# Altium PCB MidBoard.PcbDoc (part 1 of 3)
Units mm, origin at the board's own origin, x right, y up, seen from the top; angles counter-clockwise.
Board outline 150.95 x 96 mm, 2 copper layers (Top Layer, Bottom Layer); 315 components, 238 nets, 1021 pads, 291 vias.
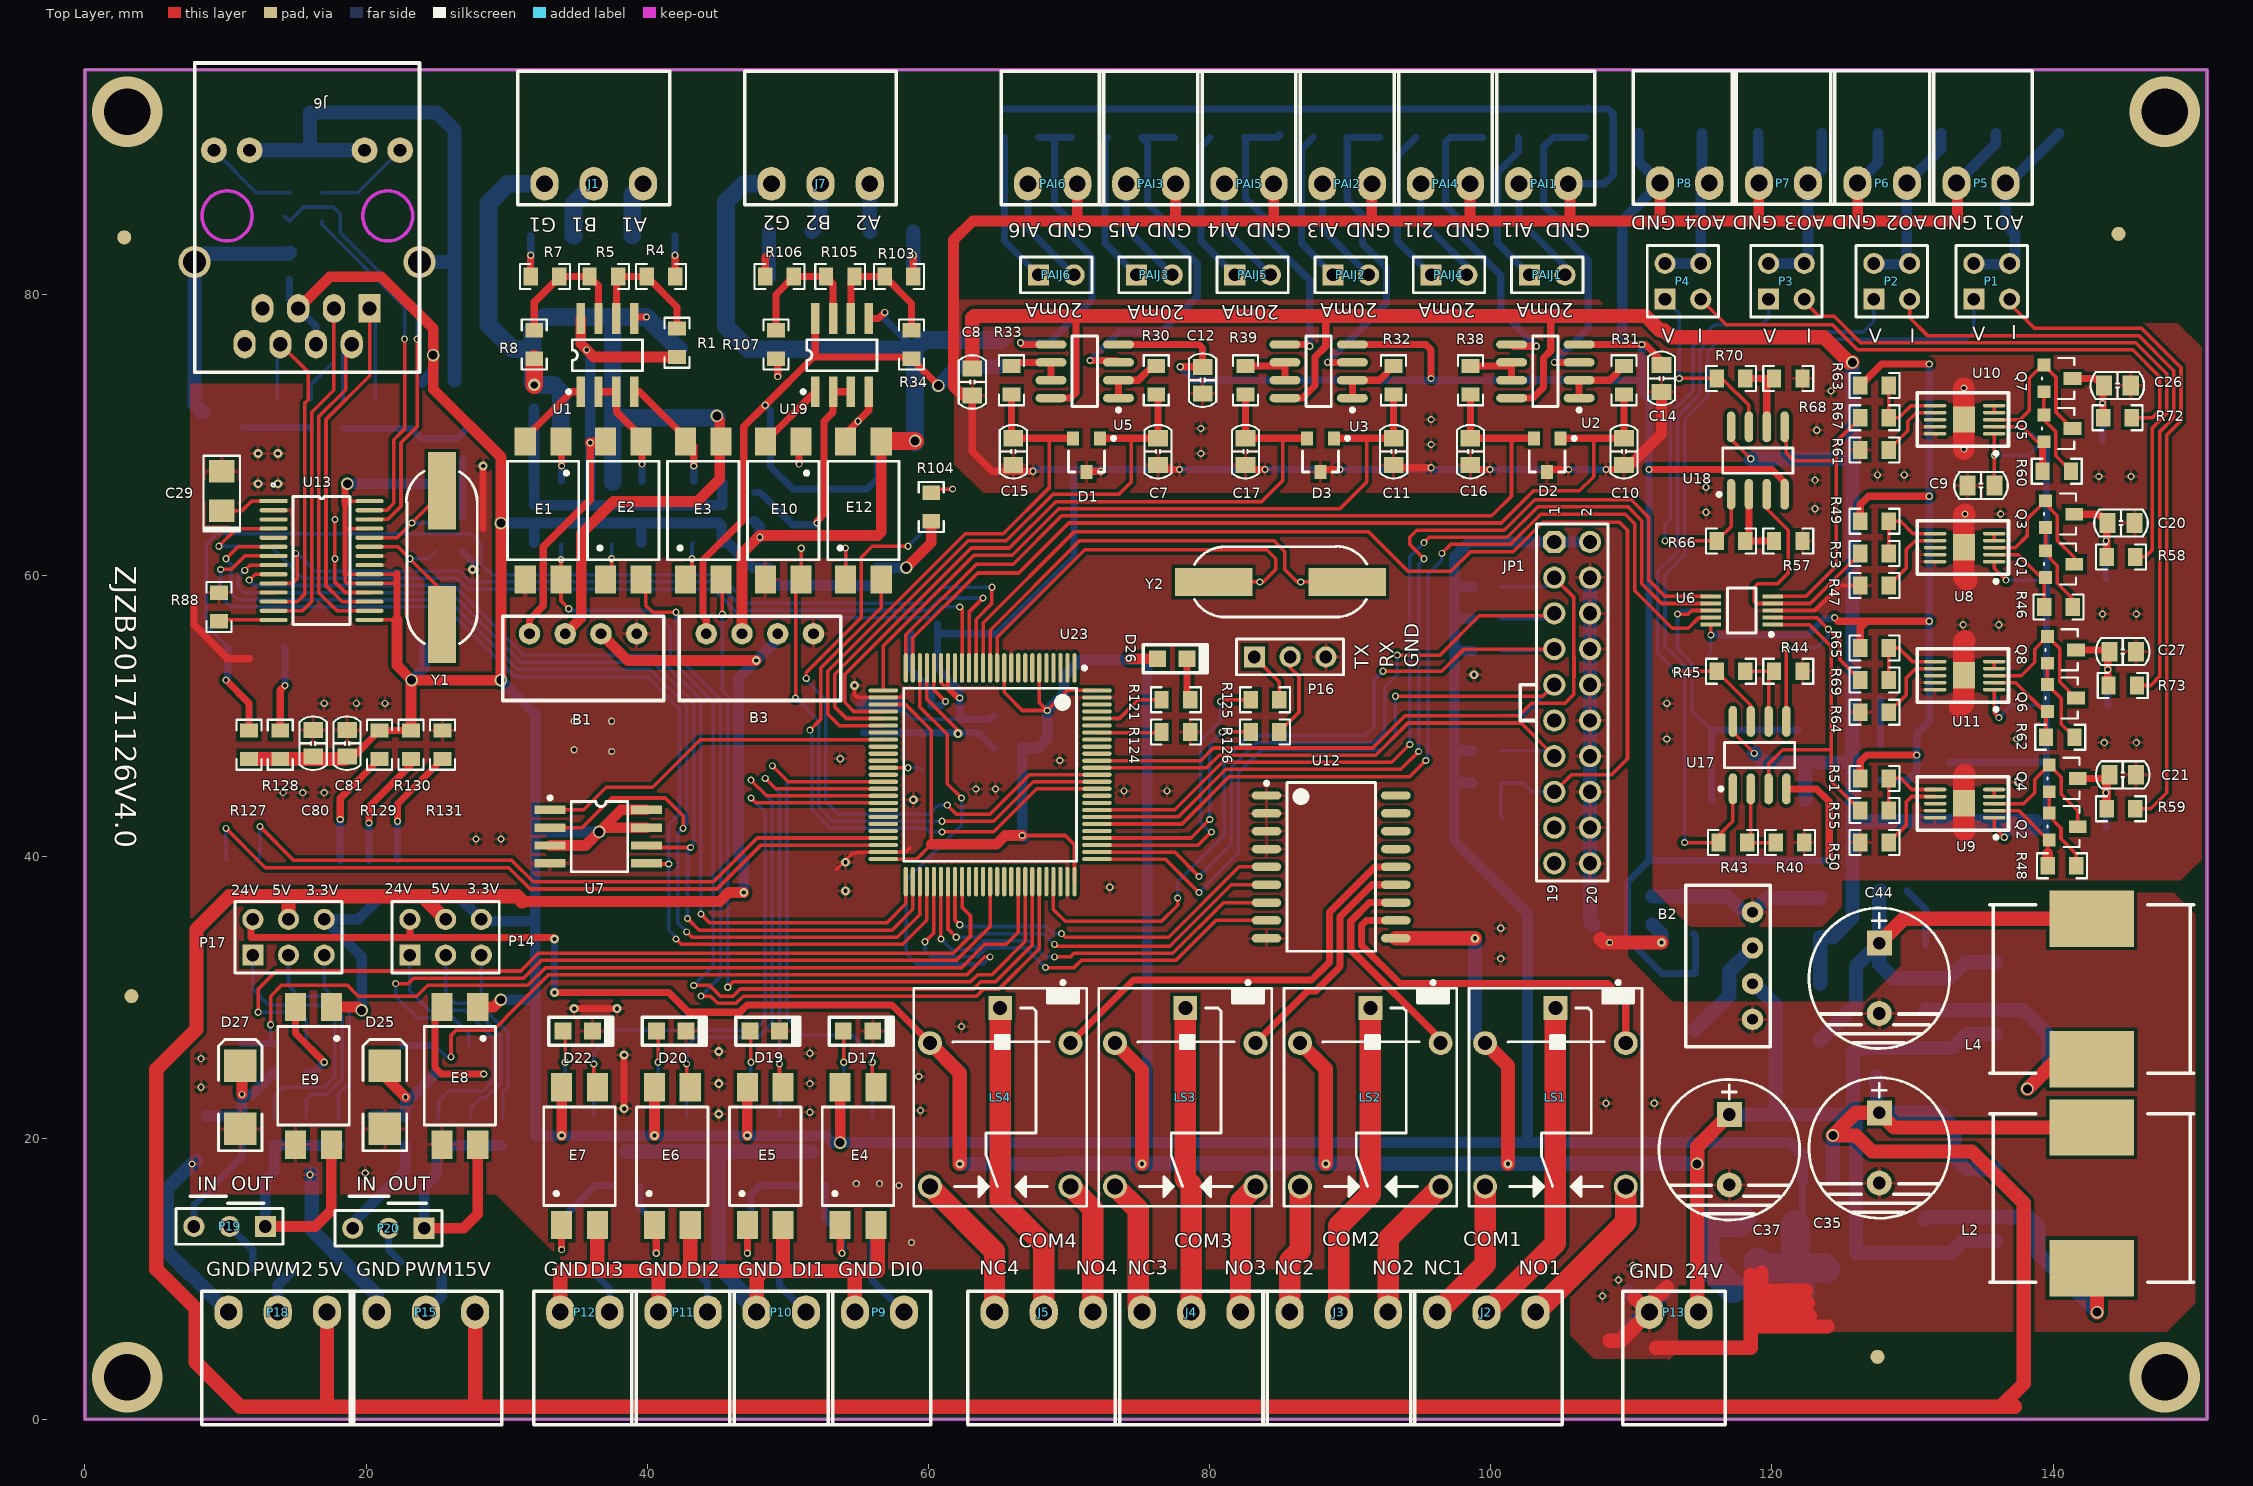
[diagram p0: Top Layer view]
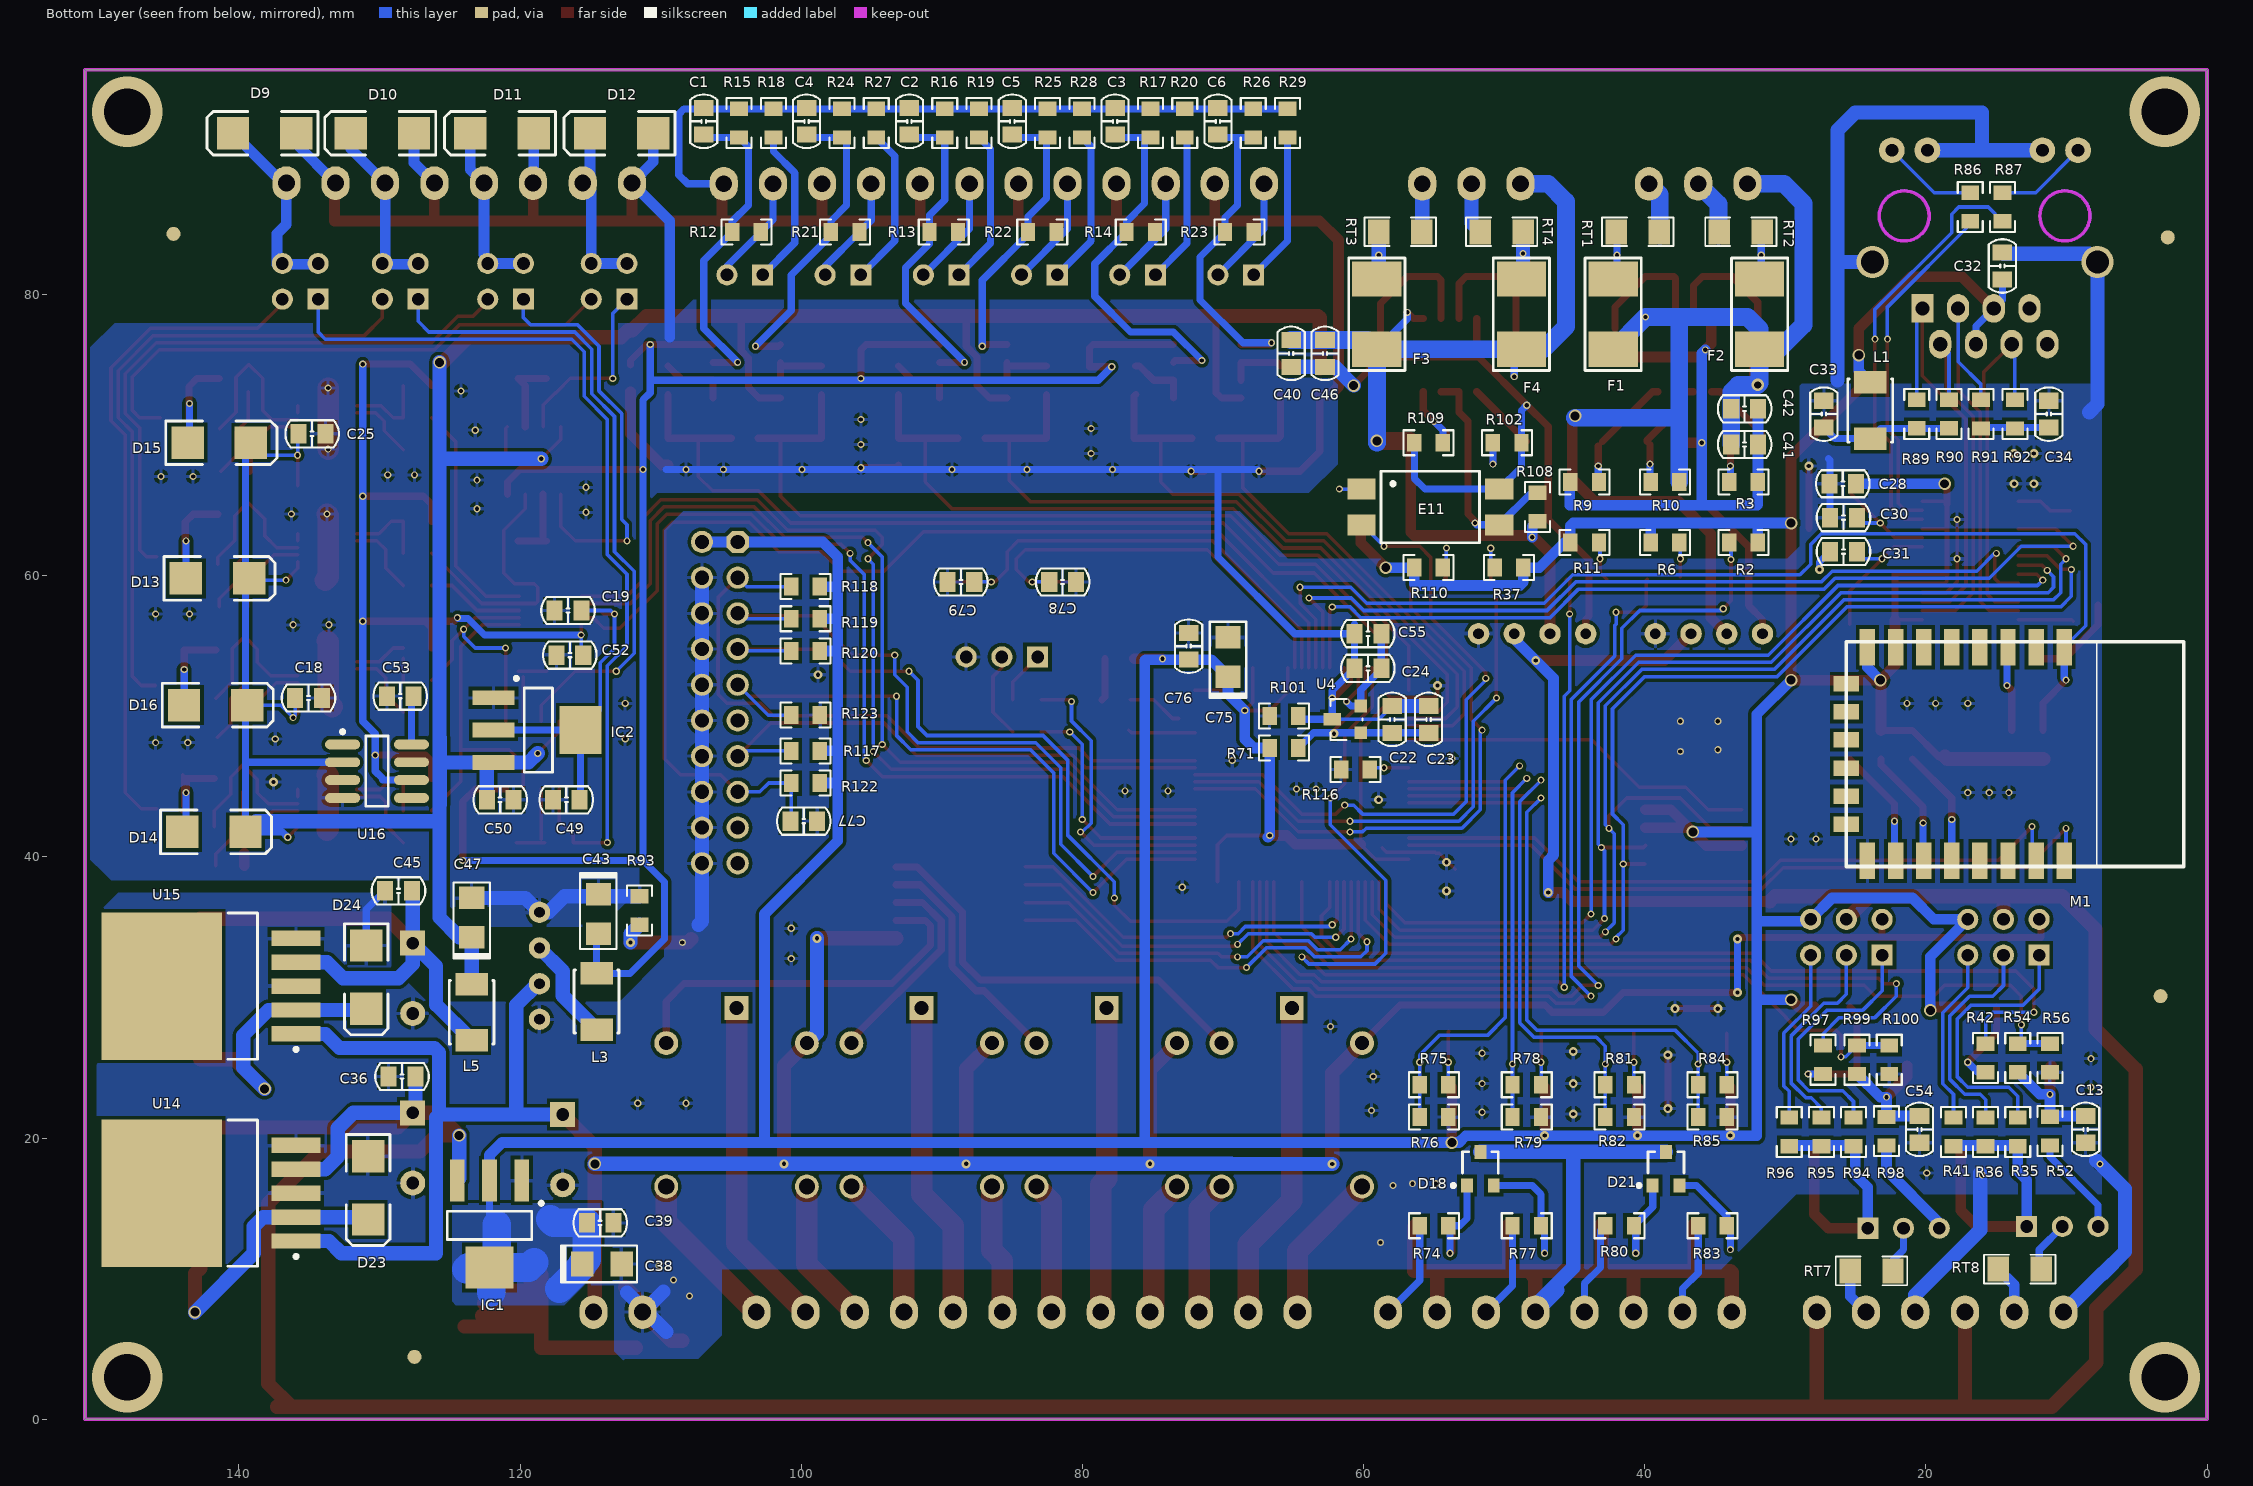
[diagram p1: Bottom Layer view, seen from below]

## Layer stack, top to bottom
Top Solder: solder mask 0.0102, Solder Resist, Dk 3.5
Top Layer: signal copper 0.0356
Dielectric1: dielectric 0.32, FR-4, Dk 4.8
Bottom Layer: signal copper 0.0356
Bottom Solder: solder mask 0.0102, Solder Resist, Dk 3.5

## Board outline
0,0 0,96 150.95,96 150.95,0

## Design rules (kind name [scope] priority, off if disabled: settings)
Clearance [All] p1: gap=0.178 ignorepadtopadclearanceinfootprint=FALSE except(0: Arc-Hole Track-Hole SMDPad-Hole THPad-Hole Via-Hole Fill-Hole Poly-Hole Region-Hole Text-Hole)
HoleSize [All] p1: absolutevalues=TRUE maxlimit=5.08 minlimit=0.025 maxpercent=80.000 minpercent=20.000
MinimumSolderMaskSliver [All] p1: minsoldermaskwidth=0.025
PlaneConnect [All] p1: planeconnectstyle=Relief reliefexpansion=0.508 reliefentries=4 reliefconductorwidth=0.254 reliefairgap=0.381
PolygonConnect [All] p1: connectstyle=Relief reliefconductorwidth=0.254 reliefentries=4 polygonreliefangle="90 Angle" airgapwidth=0.254
RoutingVias [All] p1: holewidth=0.711 width=1.27 viastyle="Through Hole" minholewidth=0.711 minwidth=1.27 maxholewidth=0.711 maxwidth=1.27
SilkToSilkClearance [All] p1: silktosilkclearance=0.051
SilkToSolderMaskClearance SilkscreenOverComponentPads [IsPad] p1: minsilkscreentomaskgap=0 clearancetoexposedcopper=TRUE
SolderMaskExpansion [All] p1: expansion=0.102
Width [All] p1: maxlimit=2.032 minlimit=0.254 preferedwidth=0.254 minimp=50.000000 maximp=50.000000 favimp=50.000000
25 further rules are at their usual default settings.

## Classes and differential pairs
component class MidPwm: C13 C54 D25 D27 E8 E9 P14 P15 P17 P18 P19 P20 R35 R36 R41 R42 R52 R54 R56 R94 R95 R96 R97 R98 R99 R100 RT7 RT8
component class MidWifi: C80 C81 M1 R127 R128 R129 R130 R131
component class MidPower: B1 B2 B3 C35 C36 C37 C38 C39 C40 C41 C42 C43 C44 C45 C46 C47 C49 C50 C52 C53 D23 D24 IC1 IC2 L2 L3 L4 L5 P13 R93 U14 U15 U16
component class MidEthernet: C28 C29 C30 C31 C32 C33 C34 J6 L1 R86 R87 R88 R89 R90 R91 R92 U13 Y1
component class MidDin: D17 D18 D19 D20 D21 D22 E4 E5 E6 E7 P9 P10 P11 P12 R74 R75 R76 R77 R78 R79 R80 R81 R82 R83 R84 R85
component class MidDac: C18 C19 C20 C21 C25 C26 C27 D9 D10 D11 D12 D13 D14 D15 D16 P1 P2 P3 P4 P5 P6 P7 P8 Q1 Q2 Q3 Q4 Q5 Q6 Q7 Q8 R40 R43 R44 R45 R46 R47 R48 R49 R50 R51 R53 R55 R57 R58 R59 R60 R61 R62 R63 R64 R65 R66 R67 R68 R69 R70 R72 R73 U6 U8 U9 U10 U11 U17 U18
component class Mid485: E1 E2 E3 E10 E11 E12 F1 F2 F3 F4 J1 J7 R1 R2 R3 R4 R5 R6 R7 R8 R9 R10 R11 R34 R37 R102 R103 R104 R105 R106 R107 R108 R109 R110 RT1 RT2 RT3 RT4 U1 U19
component class STM_MCU: C22 C23 C24 C55 C75 C76 C77 C78 C79 D26 JP1 P16 R71 R101 R116 R117 R118 R119 R120 R121 R122 R123 R124 R125 R126 U4 U7 U23 Y2
component class MidAdc: C1 C2 C3 C4 C5 C6 C7 C8 C9 C10 C11 C12 C14 C15 C16 C17 D1 D2 D3 PAI1 PAI2 PAI3 PAI4 PAI5 PAI6 PAIJ1 PAIJ2 PAIJ3 PAIJ4 PAIJ5 PAIJ6 R12 R13 R14 R15 R16 R17 R18 R19 R20 R21 R22 R23 R24 R25 R26 R27 R28 R29 R30 R31 R32 R33 R38 R39 U2 U3 U5
component class MidDout: J2 J3 J4 J5 LS1 LS2 LS3 LS4 U12

## Components (designator, comment, footprint, x,y, rotation, side; value= is the part's Value field where it differs from the comment)
B1 "B0505S" B0505S 39.243,55.88 r270 top
B2 "B2412S" B0505S 118.618,28.448 r180 top
B3 "B0505S" B0505S 51.816,55.88 r270 top
C1 "Cap" C0805 106.934,92.329 r270 bottom
C2 "Cap" C0805 92.304,92.329 r270 bottom
C3 "Cap" C0805 77.674,92.329 r270 bottom
C4 "Cap" C0805 99.619,92.329 r270 bottom
C5 "Cap" C0805 84.989,92.329 r270 bottom
C6 "Cap" C0805 70.358,92.329 r270 bottom
C7 "Cap" C0805 76.327,68.834 r90 top
C8 "Cap" C0805 63.119,73.787 r90 top
C9 "Cap" C0805 134.874,66.421 r0 top
C10 "Cap" C0805 109.474,68.834 r90 top
C11 "Cap" C0805 93.091,68.834 r90 top
C12 "Cap" C0805 79.502,73.914 r90 top
C13 "Cap" C0805 8.636,20.622 r90 bottom
C14 "Cap" C0805 112.141,74.041 r90 top
C15 "Cap" C0805 66.04,68.834 r90 top
C16 "Cap" C0805 98.552,68.834 r90 top
C17 "Cap" C0805 82.55,68.834 r90 top
C18 "Cap" C0805 135.049,51.308 r0 bottom
C19 "Cap" C0805 116.586,57.531 r180 bottom
C20 "Cap" C0805 144.828,63.754 r180 top
C21 "Cap" C0805 144.955,45.847 r180 top
C22 "Cap" C0805 57.96,49.784 r90 bottom
C23 "Cap" C0805 55.372,49.784 r90 bottom
C24 "0.1uF" C0805 59.69,53.419 r0 bottom
C25 "Cap" C0805 134.795,70.104 r0 bottom
C26 "Cap" C0805 144.574,73.533 r180 top
C27 "Cap" C0805 144.955,54.61 r180 top
C28 "Cap" C0805 25.908,66.548 r0 bottom
C29 "" C3216 9.731,66.04 r90 top
C30 "Cap" C0805 25.86,64.135 r0 bottom
C31 "Cap" C0805 25.86,61.722 r0 bottom
C32 "Cap" C0805 14.557,82.042 r90 bottom
C33 "Cap" C0805 27.257,71.501 r90 bottom
C34 "Cap" C0805 11.255,71.501 r90 bottom
C35 "Cap Pol1" Cap5*10*12 127.635,21.844 r270 top
C36 "Cap" C0805 128.397,24.384 r0 bottom
C37 "Cap Pol1" Cap5*10*12 116.967,21.717 r270 top
C38 "" C3216 114.173,11.049 r180 bottom
C39 "Cap" C0805 114.3,13.97 r0 bottom
C40 "Cap" C0805 65.151,75.819 r90 bottom
C41 "Cap" C0805 32.893,69.342 r0 bottom
C42 "Cap" C0805 32.893,71.882 r0 bottom
C43 "" C3216 114.427,35.941 r270 bottom
C44 "Cap Pol1" Cap5*10*12 127.635,33.909 r270 top
C45 "Cap" C0805 128.651,37.592 r0 bottom
C46 "Cap" C0805 62.738,75.819 r90 bottom
C47 "" C3216 123.444,35.687 r90 bottom
C49 "Cap" C0805 116.713,44.069 r180 bottom
C50 "Cap" C0805 121.412,44.069 r0 bottom
C52 "Cap" C0805 116.459,54.356 r180 bottom
C53 "Cap" C0805 128.524,51.435 r180 bottom
C54 "Cap" C0805 20.451,20.622 r90 bottom
C55 "3.3uF" C0805 59.69,55.88 r0 bottom
C75 "" C3216 69.644,54.229 r90 bottom
C76 "Cap" C0805 72.438,54.991 r90 bottom
C77 "104" C0805 99.822,42.545 r180 bottom
C78 "Cap" C0805 81.407,59.563 r180 bottom
C79 "Cap" C0805 88.646,59.563 r0 bottom
C80 "Cap" C0805 16.233,48.085 r270 top
C81 "Cap" C0805 18.646,48.085 r270 top
D1 "BAT54A" SOT23 71.247,68.58 r180 top
D2 "BAT54A" SOT23 104.013,68.58 r180 top
D3 "BAT54A" SOT23 87.884,68.58 r180 top
D9 "P6KE13A" SMB 138.176,91.488 r0 bottom
D10 "P6KE13A" SMB 129.794,91.488 r0 bottom
D11 "P6KE13A" SMB 121.285,91.488 r0 bottom
D12 "P6KE13A" SMB 112.776,91.488 r0 bottom
D13 "SS16" SMB 141.526,59.817 r180 bottom
D14 "SS16" SMB 141.78,41.783 r180 bottom
D15 "SS16" SMB 141.399,69.469 r180 bottom
D16 "SS16" SMB 141.653,50.8 r180 bottom
D17 "SML-P12YTT86" D0805 54.991,27.607 r180 top
D18 "BAT54A" SOT23 51.689,17.828 r180 bottom
D19 "SML-P12YTT86" D0805 48.345,27.607 r180 top
D20 "SML-P12YTT86" D0805 41.698,27.607 r180 top
D21 "BAT54A" SOT23 38.481,17.828 r180 bottom
D22 "SML-P12YTT86" D0805 35.052,27.607 r180 top
D23 "SK36B" SMB 130.81,16.462 r270 bottom
D24 "SK36B" SMB 130.937,31.448 r270 bottom
D25 "P6KE6.8A" SMB 21.336,22.908 r90 top
D26 "SML-P12YTT86" D0805 77.343,54.102 r180 top
D27 "P6KE6.8A" SMB 11.049,22.908 r90 top
E1 "PS2501L-1" NEC2501 32.591,64.643 r180 top
E2 "PS2501L-1" NEC2501 38.286,64.643 r0 top
E3 "PS2501L-1" NEC2501 43.981,64.643 r0 top
E4 "PS2501L-1" NEC2501 54.991,18.717 r0 top
E5 "PS2501L-1" NEC2501 48.387,18.717 r0 top
E6 "PS2501L-1" NEC2501 41.783,18.717 r0 top
E7 "PS2501L-1" NEC2501 35.179,18.717 r0 top
E8 "PS2501L-1" NEC2501 26.67,24.432 r180 top
E9 "PS2501L-1" NEC2501 16.256,24.432 r180 top
E10 "PS2501L-1" NEC2501 49.677,64.643 r180 top
E11 "PS2501L-1" NEC2501 55.245,64.897 r270 bottom
E12 "PS2501L-1" NEC2501 55.372,64.643 r0 top
F1 "P6KE6.8CA" P6KE6,8CA 42.243,78.613 r90 bottom
F2 "P6KE6.8CA" P6KE6,8CA 31.829,78.613 r270 bottom
F3 "P6KE6.8CA" P6KE6,8CA 59.055,78.613 r90 bottom
F4 "P6KE6.8CA" P6KE6,8CA 48.768,78.613 r270 bottom
IC1 "LM1117-3.3" LM1117 122.174,10.795 r0 bottom
IC2 "LM1117-5.0" LM1117 115.697,49.022 r270 bottom
J1 "*" 3.5-P3 36.195,87.884 r180 top
J2 "*" 3.5-P3 99.695,7.62 r0 top
J3 "*" 3.5-P3 89.196,7.62 r0 top
J4 "*" 3.5-P3 78.698,7.62 r0 top
J5 "*" 3.5-P3 68.199,7.62 r0 top
J6 "HR911105A" HR911105A 16.208,89.916 r90 top
J7 "*" 3.5-P3 52.324,87.884 r180 top
JP1 "HEADER 10X2" STM32-JLINK 105.664,51.054 r90 top
L1 "10uH" INDM4532N 23.955,71.755 r270 bottom
L2 "68uH" IND_HM00_12*12 142.748,15.748 r90 top
L3 "10uH" INDM4532N 114.554,29.718 r270 bottom
L4 "68uH" IND_HM00_12*12 142.748,30.607 r90 top
L5 "10uH" INDM4532N 123.444,28.956 r90 bottom
LS1 "RELAY SPDT" RELAY_OMRON_G5LE-14 109.601,16.558 r90 top
LS2 "RELAY SPDT" RELAY_OMRON_G5LE-14 96.435,16.558 r90 top
LS3 "RELAY SPDT" RELAY_OMRON_G5LE-14 83.27,16.558 r90 top
LS4 "RELAY SPDT" RELAY_OMRON_G5LE-14 70.104,16.558 r90 top
M1 "ESP-12E&F Module" "ESP-12E&F Module" 17.907,47.323 r270 bottom
P1 "Header 2X2" HDR2X2 134.366,79.677 r0 top
P2 "Header 2X2" HDR2X2 127.254,79.677 r0 top
P3 "Header 2X2" HDR2X2 119.761,79.677 r0 top
P4 "Header 2X2" HDR2X2 112.395,79.677 r0 top
P5 "Header 2" 3.5-P2 134.874,87.932 r180 top
P6 "Header 2" 3.5-P2 127.847,87.932 r180 top
P7 "Header 2" 3.5-P2 120.819,87.932 r180 top
P8 "Header 2" 3.5-P2 113.792,87.932 r180 top
P9 "Header 2" 3.5-P2 56.515,7.62 r0 top
P10 "Header 2" 3.5-P2 49.53,7.62 r0 top
P11 "Header 2" 3.5-P2 42.545,7.62 r0 top
P12 "Header 2" 3.5-P2 35.56,7.62 r0 top
P13 "Header 2" 3.5-P2 113.03,7.62 r0 top
P14 "Header 3X2" HDR2X3 23.114,33.02 r0 top
P15 "*" 3.5-P3 24.257,7.62 r0 top
P16 "Header 3" HDR1X3 83.185,54.229 r0 top
P17 "Header 3X2" HDR2X3 11.938,33.02 r0 top
P18 "*" 3.5-P3 13.716,7.62 r0 top
P19 "Header 3" HDR1X3 12.827,13.716 r180 top
P20 "Header 3" HDR1X3 24.13,13.589 r180 top
PAI1 "Header 2" 3.5-P2 103.759,87.884 r180 top
PAI2 "Header 2" 3.5-P2 89.789,87.884 r180 top
PAI3 "Header 2" 3.5-P2 75.819,87.884 r180 top
PAI4 "Header 2" 3.5-P2 96.774,87.884 r180 top
PAI5 "Header 2" 3.5-P2 82.804,87.884 r180 top
PAI6 "Header 2" 3.5-P2 68.834,87.884 r180 top
PAIJ1 "Header 2" HDR1X2 102.743,81.407 r0 top
PAIJ2 "Header 2" HDR1X2 88.773,81.407 r0 top
PAIJ3 "Header 2" HDR1X2 74.803,81.407 r0 top
PAIJ4 "Header 2" HDR1X2 95.758,81.407 r0 top
PAIJ5 "Header 2" HDR1X2 81.788,81.407 r0 top
PAIJ6 "Header 2" HDR1X2 67.818,81.407 r0 top
Q1 "SS8550" sot-23 140.485,60.833 r270 top
Q2 "SS8550" sot-23 140.739,42.164 r270 top
Q3 "SI2309" sot-23 140.485,64.389 r270 top
Q4 "SI2309" sot-23 140.739,45.593 r270 top
Q5 "SS8550" sot-23 140.358,70.485 r270 top
Q6 "SS8550" sot-23 140.612,51.308 r270 top
Q7 "SI2309" sot-23 140.358,74.041 r270 top
Q8 "SI2309" sot-23 140.612,54.737 r270 top
R1 "Res Semi" 0805 42.116,76.581 r180 top
R2 "Res Semi" 0805 32.972,62.357 r90 bottom
R3 "Res Semi" 0805 32.972,66.675 r270 bottom
R4 "Res Semi" 0805 40.973,81.28 r90 top
R5 "Res Semi" 0805 36.909,81.28 r270 top
R6 "Res Semi" 0805 38.56,62.357 r270 bottom
R7 "Res Semi" 0805 32.718,81.28 r270 top
R8 "Res Semi" 0805 31.956,76.454 r0 top
R9 "Res Semi" 0805 44.275,66.675 r90 bottom
R10 "Res Semi" 0805 38.56,66.675 r90 bottom
R11 "Res Semi" 0805 44.275,62.357 r270 bottom
R12 "Res2" 0805 103.886,84.455 r270 bottom
R13 "Res2" 0805 89.865,84.455 r270 bottom
R14 "Res2" 0805 75.844,84.455 r270 bottom
R15 "Res2" 0805 104.419,92.201 r0 bottom
R16 "Res2" 0805 89.789,92.201 r0 bottom
R17 "Res2" 0805 75.158,92.201 r0 bottom
R18 "Res Semi" 0805 101.981,92.201 r0 bottom
R19 "Res Semi" 0805 87.35,92.201 r0 bottom
R20 "Res Semi" 0805 72.72,92.201 r0 bottom
R21 "Res2" 0805 96.876,84.455 r270 bottom
R22 "Res2" 0805 82.855,84.455 r270 bottom
R23 "Res2" 0805 68.834,84.455 r270 bottom
R24 "Res2" 0805 97.104,92.201 r0 bottom
R25 "Res2" 0805 82.474,92.201 r0 bottom
R26 "Res2" 0805 67.843,92.201 r0 bottom
R27 "Res Semi" 0805 94.665,92.201 r0 bottom
R28 "Res Semi" 0805 80.035,92.201 r0 bottom
R29 "Res Semi" 0805 65.405,92.201 r0 bottom
R30 "Res Semi" 0805 76.2,73.914 r0 top
R31 "Res Semi" 0805 109.474,73.914 r0 top
R32 "Res Semi" 0805 93.091,73.914 r0 top
R33 "Res Semi" 0805 65.913,73.914 r0 top
R34 "Res Semi" 0805 58.801,76.454 r180 top
R35 "Res Semi" 0805 13.462,20.447 r180 bottom
R36 "Res Semi" 0805 15.748,20.447 r180 bottom
R37 "Res Semi" 0805 49.657,60.579 r90 bottom
R38 "Res Semi" 0805 98.552,73.914 r0 top
R39 "Res Semi" 0805 82.55,73.914 r0 top
R40 "Res2" 0805 121.285,41.021 r270 top
R41 "Res Semi" 0805 18.034,20.447 r180 bottom
R42 "Res Semi" 0805 15.748,25.702 r0 bottom
R43 "Res2" 0805 117.221,41.021 r270 top
R44 "Res2" 0805 121.158,53.213 r270 top
R45 "Res2" 0805 117.094,53.213 r270 top
R46 "Res2" 0805 140.383,57.785 r90 top
R47 "Res2" 0805 127.302,59.309 r270 top
R48 "Res2" 0805 140.637,39.37 r90 top
R49 "Res2" 0805 127.302,63.881 r90 top
R50 "Res2" 0805 127.302,41.021 r270 top
R51 "Res2" 0805 127.302,45.593 r90 top
R52 "Res Semi" 0805 11.176,20.495 r0 bottom
R53 "Res2" 0805 127.302,61.595 r270 top
R54 "Res Semi" 0805 13.462,25.702 r0 bottom
R55 "Res2" 0805 127.302,43.307 r270 top
R56 "Res Semi" 0805 11.176,25.702 r180 bottom
R57 "Res2" 0805 121.158,62.484 r270 top
R58 "Res2" 0805 144.828,61.341 r90 top
R59 "Res2" 0805 144.828,43.434 r90 top
R60 "Res2" 0805 140.256,67.437 r90 top
R61 "Res2" 0805 127.302,68.961 r270 top
R62 "Res2" 0805 140.51,48.514 r90 top
R63 "Res2" 0805 127.302,73.533 r90 top
R64 "Res2" 0805 127.302,50.292 r270 top
R65 "Res2" 0805 127.302,54.864 r90 top
R66 "Res2" 0805 117.094,62.484 r270 top
R67 "Res2" 0805 127.302,71.247 r270 top
R68 "Res2" 0805 121.158,74.041 r270 top
R69 "Res2" 0805 127.302,52.578 r270 top
R70 "Res2" 0805 117.094,74.041 r270 top
R71 "Res Semi" 0805 65.659,47.752 r90 bottom
R72 "Res2" 0805 144.574,71.247 r90 top
R73 "Res2" 0805 144.955,52.197 r90 top
R74 "Res Semi" 0805 54.991,13.764 r90 bottom
R75 "Res Semi" 0805 54.991,23.797 r90 bottom
R76 "Res Semi" 0805 54.991,21.511 r90 bottom
R77 "Res Semi" 0805 48.387,13.764 r90 bottom
R78 "Res Semi" 0805 48.387,23.797 r90 bottom
R79 "Res Semi" 0805 48.387,21.511 r90 bottom
R80 "Res Semi" 0805 41.783,13.764 r90 bottom
R81 "Res Semi" 0805 41.783,23.797 r90 bottom
R82 "Res Semi" 0805 41.783,21.511 r90 bottom
R83 "Res Semi" 0805 35.179,13.764 r90 bottom
R84 "Res Semi" 0805 35.179,23.797 r90 bottom
R85 "Res Semi" 0805 35.179,21.511 r90 bottom
R86 "Res Semi" 0805 16.843,86.233 r180 bottom
R87 "Res Semi" 0805 14.557,86.233 r180 bottom
R88 "Res Semi" 0805 9.525,57.785 r180 top
R89 "Res Semi" 0805 20.653,71.502 r180 bottom
R90 "Res Semi" 0805 18.357,71.502 r180 bottom
R91 "Res Semi" 0805 16.081,71.501 r180 bottom
R92 "Res Semi" 0805 13.668,71.501 r180 bottom
R93 "Res Semi" 0805 111.506,36.195 r180 bottom
R94 "Res Semi" 0805 25.146,20.447 r180 bottom
R95 "Res Semi" 0805 27.432,20.447 r180 bottom
R96 "Res Semi" 0805 29.718,20.447 r180 bottom
R97 "Res Semi" 0805 27.305,25.575 r0 bottom
R98 "Res Semi" 0805 22.806,20.494 r0 bottom
R99 "Res Semi" 0805 24.892,25.575 r0 bottom
R100 "Res Semi" 0805 22.606,25.575 r180 bottom
R101 "Res Semi" 0805 65.659,50.038 r90 bottom
R102 "Res Semi" 0805 49.784,69.469 r270 bottom
R103 "Res Semi" 0805 57.912,81.28 r90 top
R104 "Res Semi" 0805 60.198,64.897 r0 top
R105 "Res Semi" 0805 53.721,81.28 r270 top
R106 "Res Semi" 0805 49.403,81.28 r270 top
R107 "Res Semi" 0805 49.149,76.454 r0 top
R108 "Res Semi" 0805 47.625,64.897 r180 bottom
R109 "Res Semi" 0805 55.372,69.469 r90 bottom
R110 "Res Semi" 0805 55.372,60.579 r270 bottom
R116 "Res2" 0805 60.579,46.228 r90 bottom
R117 "Res Semi" 0805 99.695,47.546 r90 bottom
R118 "Res Semi" 0805 99.695,59.23 r90 bottom
R119 "Res Semi" 0805 99.695,56.944 r90 bottom
R120 "Res Semi" 0805 99.695,54.658 r90 bottom
R121 "Res Semi" 0805 77.597,51.181 r90 top
R122 "10K" 0805 99.695,45.26 r90 bottom
R123 "Res Semi" 0805 99.695,50.086 r270 bottom
R124 "Res2" 0805 77.597,48.895 r270 top
R125 "Res1" 0805 83.947,51.181 r90 top
R126 "Res1" 0805 83.947,48.895 r90 top
R127 "Res2" 0805 11.656,47.984 r0 top
R128 "Res2" 0805 13.891,47.984 r0 top
R129 "Res2" 0805 20.952,47.984 r0 top
R130 "Res2" 0805 23.188,47.984 r0 top
R131 "Res2" 0805 25.423,47.984 r0 top
RT1 "SMD1206P025TF" 1206 40.513,84.455 r180 bottom
RT2 "SMD1206P025TF" 1206 33.147,84.48 r0 bottom
RT3 "SMD1206P025TF" 1206 57.404,84.455 r180 bottom
RT4 "SMD1206P025TF" 1206 50.165,84.48 r0 bottom
RT7 "SMD1206P025TF" 1206 23.876,10.541 r180 bottom
RT8 "SMD1206P025TF" 1206 13.335,10.668 r180 bottom
U1 "MAX485EESA" NSO8 37.163,75.692 r0 top
U2 "LM358D" 751-02_N 103.886,74.549 r180 top
U3 "LM358D" 751-02_N 87.757,74.549 r180 top
U4 "REF3025" SOT-23 61.214,49.784 r90 bottom
U5 "LM358D" 751-02_N 71.12,74.549 r180 top
U6 "DAC7554" VSSOP10 117.856,57.531 r180 top
U7 "W25Q16VSSIG" wsop8 36.703,41.577 r0 top
U8 "XTR111" TSSOP-10_P 135.811,61.002 r90 top
U9 "XTR111" TSSOP-10_P 135.811,42.799 r90 top
U10 "XTR111" TSSOP-10_P 135.811,70.104 r90 top
U11 "XTR111" TSSOP-10_P 135.811,51.901 r90 top
U12 "ULN2803LW" SO18WN 88.646,39.37 r180 top
U13 "ENC28J60" SSOP28 16.843,61.087 r180 top
U14 "LM2596S-5.0" TS5B_M 141.986,16.081 r0 bottom
U15 "LM2596S-12" TS5B_M 141.986,30.813 r0 bottom
U16 "AD586JR" SOP8_M 130.175,46.101 r180 bottom
U17 "LM358D" 751-02_N 119.126,47.244 r90 top
U18 "LM358D" 751-02_N 118.999,68.199 r90 top
U19 "MAX485EESA" NSO8 53.848,75.692 r0 top
U23 "STM32F103VCT6" LQFP100_M 64.389,45.847 r270 top
Y1 "XTAL" CY 25.4,66.04 r270 top
Y2 "XTAL" CY 89.789,59.563 r180 top

## Footprints (in the part's own frame and the unit in brackets; to place one, negate y for a bottom-side part, rotate by r counter-clockwise, add the part's x,y. Pads: shape width x height; smd on the part's side, far side on the other; paste and mask are expansions set on the pad)
3.5-P2 [mm]
  oval 2x2.4 hole 1.2: 1(-1.75,0) 2(1.75,0)
  silkscreen extent -3.65,-8 3.65,1.5
3.5-P3 [mm]
  oval 2x2.4 hole 1.2: 1(-3.5,0) 2(0,0) 3(3.5,0)
  silkscreen extent -5.4,-8 5.4,1.5
751-02_N [mm] "SOIC, 8-Leads, Body 4.9x3.9mm, Pitch 1.27mm, IPC Medium Density"
  oval 2.2x0.6 smd: 1(-2.4,1.905) 2(-2.4,0.635) 3(-2.4,-0.635) 4(-2.4,-1.905) 5(2.4,-1.905) 6(2.4,-0.635) 7(2.4,0.635) 8(2.4,1.905)
  silkscreen extent -2.53,-2.5 0.9,2.88, body extent -1.95,-2.45 1.95,2.45, height 1.75
0805 [mil]
  rect 50x40 smd: 1(0,40) 2(0,-40)
  silkscreen extent -35,-70 35,70
1206 [mil]
  rect 60x70 smd: 1(-59.5,0.5) 2(60.5,0.5)
  silkscreen extent -100,-40 100,41
B0505S [mil]
  round 60 hole 30: 1(0,0) 2(0,-100) 3(0,-200) 4(0,-300)
  silkscreen extent -49,-376 187,76
C0805 [mil]
  rect 45x55 smd: 1(37.5,0) 2(-37.5,0)
  silkscreen extent -75,-38 75,38
C3216 [mm]
  rect 1.6x1.8 smd mask+0.125: 1(-1.4,0) 2(1.4,0)
  Top Layer pour cut-out: -0.762,1.27 0.762,1.27 0.762,-1.27 -0.762,-1.27
  silkscreen extent -2.9,-1.3 2.5,1.3
Cap5*10*12 [mil]
  rect 70x70 / inner round 70 / far side rect 70x70 hole 35.43: 1(1.57,0)
  round 70 hole 35.43: 2(198.43,0)
  silkscreen extent -97,-197 297,197
CY [mm]
  rect 5.5x2 smd: 1(0,0) 2(9.5,0)
  silkscreen extent -1.4,-2.54 10.87,2.5
D0805 [mm]
  rect 1.2x1.2 smd: 1(1.05,0) 2(-1.05,0)
  silkscreen extent -2.5,-1 2.05,1
"ESP-12E&F Module" [mm]
  rect 2.6x1.1 smd: 1(-7.6,7.75) 2(-7.6,5.75) 3(-7.6,3.75) 4(-7.6,1.75) 5(-7.6,-0.25) 6(-7.6,-2.25) 7(-7.6,-4.25) 8(-7.6,-6.25) 15(7.6,-6.25) 16(7.6,-4.25) 17(7.6,-2.25) 18(7.6,-0.25) 19(7.6,1.75) 20(7.6,3.75) 21(7.6,5.75) 22(7.6,7.75)
  rect 1.1x1.8 smd: 9(-5,-7.75) 10(-3,-7.75) 11(-1,-7.75) 12(1,-7.75) 13(3,-7.75) 14(5,-7.75)
  silkscreen extent -8,-7.75 8,16.25
HDR1X2 [mm] "Connector; Header; 2 Position"
  rect 1.5x1.5 hole 0.9: 1(0,0)
  round 1.5 hole 0.9: 2(2.54,0)
  silkscreen extent -1.27,-1.27 3.81,1.27
HDR1X3 [mm] "Connector; Header; 3 Position"
  rect 1.5x1.5 hole 0.9: 1(0,0)
  round 1.5 hole 0.9: 2(2.54,0) 3(5.08,0)
  silkscreen extent -1.27,-1.27 6.35,1.27
HDR2X2 [mm] "Connector; Header; 2x2 Position"
  rect 1.5x1.5 hole 0.9: 1(0,0)
  round 1.5 hole 0.9: 2(0,2.54) 3(2.54,0) 4(2.54,2.54)
  silkscreen extent -1.27,-1.27 3.81,3.81
HDR2X3 [mm] "Connector; Header; 3x2 Position"
  rect 1.5x1.5 hole 0.9: 1(0,0)
  round 1.5 hole 0.9: 2(0,2.54) 3(2.54,0) 4(2.54,2.54) 5(5.08,0) 6(5.08,2.54)
  silkscreen extent -1.27,-1.27 6.35,3.81
HR911105A [mil] "HR911105A"
  rect 80x62 hole 40: 1(-429,-159)
  oval 80x62 hole 40: 2(-529,-109) 3(-429,-59) 4(-529,-9) 5(-429,41) 6(-529,91) 7(-429,141) 8(-529,191)
  round 72 hole 36: 9(13.91,-244.63) 10(13.91,-145) 11(13.91,176.87) 12(13.91,277)
  round 90 hole 65: 13(-299.08,-298.76) 13(-299.08,331.16)
  Multi-Layer circle w5: c-169,241 r70.8
  Multi-Layer circle w5: c-169,-209 r70.8
  silkscreen extent -608,-299 258,331
IND_HM00_12*12 [mm]
  rect 4x6 smd: 1(-5,0) 2(5,0)
  silkscreen extent -6,-7.24 6,7.24
INDM4532N [mm]
  rect 1.6x2.3 smd: 1(-2,0) 2(2,0)
  silkscreen extent -2.25,-1.6 2.25,1.6
LM1117 [mm]
  rect 1.05x3 smd: 1(2.3,-6.2) 2(0,-6.2) 3(-2.3,-6.2)
  rect 3.4x3 smd: 4(0,0)
  silkscreen extent -3.81,-4.7 3,-2
LQFP100_M [mm] "Thin QFP, 100-Leads, Body 14x14mm, Pitch 0.5mm, IPC Low Density"
  oval 2.1x0.3 smd: 1(-7.6,6) 2(-7.6,5.5) 3(-7.6,5) 4(-7.6,4.5) 5(-7.6,4) 6(-7.6,3.5) 7(-7.6,3) 8(-7.6,2.5) 9(-7.6,2) 10(-7.6,1.5) 11(-7.6,1) 12(-7.6,0.5) 13(-7.6,0) 14(-7.6,-0.5) 15(-7.6,-1) 16(-7.6,-1.5) 17(-7.6,-2) 18(-7.6,-2.5) 19(-7.6,-3) 20(-7.6,-3.5) 21(-7.6,-4) 22(-7.6,-4.5) 23(-7.6,-5) 24(-7.6,-5.5) 25(-7.6,-6) 51(7.6,-6) 52(7.6,-5.5) 53(7.6,-5) 54(7.6,-4.5) 55(7.6,-4) 56(7.6,-3.5) 57(7.6,-3) 58(7.6,-2.5) 59(7.6,-2) 60(7.6,-1.5) 61(7.6,-1) 62(7.6,-0.5) 63(7.6,0) 64(7.6,0.5) 65(7.6,1) 66(7.6,1.5) 67(7.6,2) 68(7.6,2.5) 69(7.6,3) 70(7.6,3.5) 71(7.6,4) 72(7.6,4.5) 73(7.6,5) 74(7.6,5.5) 75(7.6,6)
  oval 0.3x2.1 smd: 26(-6,-7.6) 27(-5.5,-7.6) 28(-5,-7.6) 29(-4.5,-7.6) 30(-4,-7.6) 31(-3.5,-7.6) 32(-3,-7.6) 33(-2.5,-7.6) 34(-2,-7.6) 35(-1.5,-7.6) 36(-1,-7.6) 37(-0.5,-7.6) 38(0,-7.6) 39(0.5,-7.6) 40(1,-7.6) 41(1.5,-7.6) 42(2,-7.6) 43(2.5,-7.6) 44(3,-7.6) 45(3.5,-7.6) 46(4,-7.6) 47(4.5,-7.6) 48(5,-7.6) 49(5.5,-7.6) 50(6,-7.6) 76(6,7.6) 77(5.5,7.6) 78(5,7.6) 79(4.5,7.6) 80(4,7.6) 81(3.5,7.6) 82(3,7.6) 83(2.5,7.6) 84(2,7.6) 85(1.5,7.6) 86(1,7.6) 87(0.5,7.6) 88(0,7.6) 89(-0.5,7.6) 90(-1,7.6) 91(-1.5,7.6) 92(-2,7.6) 93(-2.5,7.6) 94(-3,7.6) 95(-3.5,7.6) 96(-4,7.6) 97(-4.5,7.6) 98(-5,7.6) 99(-5.5,7.6) 100(-6,7.6)
  silkscreen extent -7.72,-6.15 6.15,6.83, body extent -7,-7 7,7, height 1.6
NEC2501 [mm]
  rect 1.5x2 smd: 1(-1.27,-4.9) 2(1.27,-4.9) 3(1.27,4.9) 4(-1.27,4.9)
  silkscreen extent -2.54,-3.5 2.54,3.5
NSO8 [mm]
  rect 0.6x2.2 smd: 1(-1.905,-2.6) 2(-0.635,-2.6) 3(0.635,-2.6) 4(1.905,-2.6) 5(1.905,2.6) 6(0.635,2.6) 7(-0.635,2.6) 8(-1.905,2.6)
  silkscreen extent -2.88,-2.72 2.5,1.1
P6KE6,8CA [mm]
  rect 2.5x3.5 smd: 1(-2.5,0) 2(2.5,0)
  silkscreen extent -4,-2 4,2
RELAY_OMRON_G5LE-14 [mm]
  rect 1.7x1.7 / inner round 1.7 / far side rect 1.7x1.7 hole 1: 1(12.7,5)
  round 1.7 hole 1: 2(10.2,10) 5(10.2,0)
  round 1.7 hole 1.15: 3(0,10) 4(0,0)
  silkscreen extent -1.4,-1.15 14.63,11.15
SMB [mm] "DO-214-AA/SMB; 2 C-Bend Leads; Body 5.3 x 3.6 mm, inc. leads (LxW)"
  rect 2.3x2.3 smd: 1(-2.25,0) 2(2.25,0)
  silkscreen extent -3.8,-1.55 4.1,1.55
SO18WN [mm]
  oval 2.1x0.6 smd: 1(4.6,-5.003) 2(4.6,-3.733) 3(4.6,-2.463) 4(4.6,-1.193) 5(4.6,0.077) 6(4.6,1.347) 7(4.6,2.617) 8(4.6,3.887) 9(4.6,5.157) 10(-4.6,5.157) 11(-4.6,3.887) 12(-4.6,2.617) 13(-4.6,1.347) 14(-4.6,0.077) 15(-4.6,-1.193) 16(-4.6,-2.463) 17(-4.6,-3.733) 18(-4.6,-5.003)
  silkscreen extent -3.15,-6 4.72,6.08
SOP8_M [mm] "SOIC,"
  oval 2.5x0.7 smd: 1(-2.45,1.905) 2(-2.45,0.635) 3(-2.45,-0.635) 4(-2.45,-1.905) 5(2.45,-1.905) 6(2.45,-0.635) 7(2.45,0.635) 8(2.45,1.905)
  silkscreen extent -2.58,-2.5 0.8,2.93, body extent -2,-2.5 2,2.5, height 1.75
SOT23 [mm]
  rect 0.85x1 smd: 1(-0.95,-1.2) 2(0.95,-1.2) 3(0,1.2)
  silkscreen extent -2.05,-1.32 1.28,1.2
sot-23 [mil]
  rect 36x36 smd: 1(37.5,-40) 2(-37.5,-40)
  rect 36x50 smd: 3(0.5,40)
  silkscreen extent -58,-45 58,45
SOT-23 [mil]
  rect 36x36 smd: 1(37.5,-40) 2(-37.5,-40)
  rect 36x50 smd: 3(0.5,40)
  silkscreen extent -58,-45 57,45
SSOP28 [mm]
  rect 2x0.3 smd: 1(3.425,-4.225)
  oval 2x0.3 smd: 2(3.425,-3.575) 3(3.425,-2.925) 4(3.425,-2.275) 5(3.425,-1.625) 6(3.425,-0.975) 7(3.425,-0.325) 8(3.425,0.325) 9(3.425,0.975) 10(3.425,1.625) 11(3.425,2.275) 12(3.425,2.925) 13(3.425,3.575) 14(3.425,4.225) 15(-3.4,4.225) 16(-3.4,3.575) 17(-3.4,2.925) 18(-3.4,2.275) 19(-3.4,1.625) 20(-3.4,0.975) 21(-3.4,0.325) 22(-3.4,-0.325) 23(-3.4,-0.975) 24(-3.4,-1.625) 25(-3.4,-2.275) 26(-3.4,-2.925) 27(-3.4,-3.575) 28(-3.4,-4.225)
  silkscreen extent -2,-5.5 3.57,4.55
STM32-JLINK [mil]
  oct 62x62 hole 40: 1(447.05,45.08)
  round 62 hole 40: 2(447.05,-54.92) 3(347.05,45.08) 4(347.05,-54.92) 5(247.05,45.08) 6(247.05,-54.92) 7(147.05,45.08) 8(147.05,-54.92) 9(47.05,45.08) 10(47.05,-54.92) 11(-52.95,45.08) 12(-52.95,-54.92) 13(-152.95,45.08) 14(-152.95,-54.92) 15(-252.95,45.08) 16(-252.95,-54.92) 17(-352.95,45.08) 18(-352.95,-54.92) 19(-452.95,45.08) 20(-452.95,-54.92)
  silkscreen extent -503,-105 497,140
TS5B_M [mm] "D2-PAK, 6-Leads, Body 8.6x10.2mm, Pitch 1.7mm, Lead Span 14.1mm, IPC Low Density"
  rect 3.5x1.1 smd: 1(-6.05,3.4) 2(-6.05,1.7) 3(-6.05,0) 4(-6.05,-1.7) 5(-6.05,-3.4)
  rect 8.6x10.5 smd: 6(3.5,0)
  silkscreen extent -6.17,-5.2 -1.2,5.2, body extent -3.3,-5.2 6.1,5.2, height 4.65
TSSOP-10_P [mm]
  rect 1.88x1.57 smd: 0(1.016,2.159)
  oval 0.25x1.6 smd: 1(0,0) 2(0.5,0) 3(1,0) 4(1.5,0) 5(2,0) 6(2,4.2) 7(1.5,4.2) 8(1,4.2) 9(0.5,4.2) 10(0,4.2)
  silkscreen extent -1.52,-1.02 2.92,5.46, body extent -0.6,0.5 2.6,3.7, height 1.1
VSSOP10 [mm]
  rect 1.45x0.3 smd: 1(-2.2,1) 2(-2.2,0.5) 3(-2.2,0) 4(-2.2,-0.5) 5(-2.2,-1) 6(2.2,-1) 7(2.2,-0.5) 8(2.2,0) 9(2.2,0.5) 10(2.2,1)
  silkscreen extent -2.22,-1.6 1.02,1.82, body extent -1.6,-1.6 1.6,1.6, height 1.1
wsop8 [mm]
  rect 2.2x0.6 smd: 1(-3.616,1.778) 2(-3.616,0.508) 3(-3.616,-0.762) 4(-3.616,-2.032) 5(3.235,-2.032) 6(3.235,-0.762) 7(3.235,0.508) 8(3.235,1.778)
  silkscreen extent -3.74,-2.63 1.91,2.75

## Part data
B2: library part B0505S
C22 C23 C36 C40 C41 C42 C45 C46 C76: library part Cap_2
C24 C55: library part Cap, "Cap"
C29 C38 C43 C47 C75: library part "Cap Pol2", "Polarized Capacitor (Axial)"
C35 C37 C44: "Polarized Capacitor (R"
C77: library part Cap_2, "Cap"
D1 D2 D3 D18 D21: library part BAT54A/SOT_2
D9 D10 D11 D12 D13 D14 D15 D16 D23 D24 D25 D27: library part "D Schottky", "Schottky Diode"
D17 D19 D20 D22 D26: "LED, GRE"
E1 E2 E3 E8 E9 E10 E11 E12: library part OPT, "光?"
E4 E5 E6 E7: library part O, "光?"
F1 F2 F3 F4: library part TVS, "快速"
IC1 IC2: library part LM1117
J1 J2 J3 J4 J5 J7 P15 P18: library part CON3
J6: library part HR911102
L1 L3 L5: library part IN
LS1 LS2 LS3 LS4: library part RELAY
P1 P2 P3 P4: "Header, 2-Pin, Dual row"
P5 P6 P7 P8 P9 P10 P11 P12 P13 PAI1 PAI2 PAI3 PAI4 PAI5 PAI6 PAIJ1 PAIJ2 PAIJ3 PAIJ4 PAIJ5 PAIJ6: "Header, 2-Pin"
P14 P17: "Header, 3-Pin, Dual row"
P16 P19 P20: "Header, 3-Pin"
Q1 Q2 Q5 Q6: library part 2N3906, "PNP General Purpose Amplifier"
Q3 Q4 Q7 Q8: library part MOSFET-P, "P-Channel MOSFET"
R1 R2 R3 R4 R5 R6 R7 R8 R9 R10 R11 R18 R19 R20 R27 R28 R29 R30 R31 R32 R33 R34 R35 R36 R37 R38 R39 R41 R42 R52 R54 R56 R71 R74 R75 R76 R77 R78 R79 R80 R81 R82 R83 R84 R85 R86 R87 R88 R89 R90 R91 R92 R93 R94 R95 R96 R97 R98 R99 R100 R101 R102 R103 R104 R105 R106 R107 R108 R109 R110 R117 R118 R119 R120 R121 R123: "Semiconductor Resistor"
R12 R13 R14 R15 R16 R17 R21 R22 R23 R24 R25 R26 R40 R43 R44 R45 R46 R47 R48 R49 R50 R51 R53 R55 R57 R58 R59 R60 R61 R62 R63 R64 R65 R66 R67 R68 R69 R70 R72 R73 R116 R124 R127 R128 R129 R130 R131: library part RES
R122: library part "Res Semi", "Semiconductor Resistor"
R125 R126: "Resistor"
RT1 RT2 RT3 RT4 RT7 RT8: library part PTC, "热?"
U1 U19: library part MAX485ESA, "Low-Power, Slew-Rate-Limited RS-485/RS-422 Transceiver"
U2 U3 U5 U17 U18: "Dual Low-Power Operational Amplifier"
U4: library part REF3012
U7: library part A
U12: library part U
U14 U15: "Simple Switcher Power Converter 150 kHz 3A Step Down Voltage Regulator"
U16: library part AD586L
U23: library part STM32F103VBT6, "STM32 ARM-based 32-bit MCU with 64 Kbytes Flash, 100-pin LQFP, Industrial Temperature"
Y1 Y2: "Crystal Oscillator"

## Free pads (board coordinates)
  round 1 smd paste+0.5 mask+0.5: 0(2.794,84.074) 0(3.302,30.099) 0(127.508,4.445) 0(144.653,84.328)
  round 1 smd far side paste+0.5 mask+0.5: 0(2.794,84.074) 0(3.302,30.099) 0(127.508,4.445) 0(144.653,84.328)

## Via types
v1: diameter 0.508, hole 0.305, Top Layer to Bottom Layer, tented both sides, 235 vias
v2: diameter 0.635, hole 0.305, Top Layer to Bottom Layer, tented both sides, 33 vias
v3: diameter 0.889, hole 0.635, Top Layer to Bottom Layer, tented both sides, 18 vias
v4: diameter 5, hole 3.3, Top Layer to Bottom Layer, tented both sides, 4 vias
v5: diameter 0.889, hole 0.508, Top Layer to Bottom Layer, tented both sides, 1 vias

## Nets (pads, with @x,y where several pads share a name; then routed paths per layer and width w, separated by ;. In a path a pad name is that pad's centre, name@x,y a point inside that pad or via, vN(x,y) a via of type N, cw(c..) or ccw(c..) an arc to the next point about the centre after c; other vN are vias at no path point)
+24V_IN: B2.2 C37.1 LS1.2 LS2.2 LS3.2 LS4.2 P13.2 P14.2 P17.2 U12.10 U14.1 U15.1 | length 229.7
  Top Layer w0.508: P17.2@11.938,35.56 11.811,35.433 11.811,34.278 22.987,34.278 ; P14.2@23.114,35.56 23.114,34.405 22.987,34.278 ; v2(33.401,30.353) 41.529,30.353 42.926,28.956 46.574,28.956 47.082,29.464 57.398,29.464 LS4.2@60.104,26.758 ; v2(33.401,34.163) 33.286,34.278 22.987,34.278
  Top Layer w1.016: LS4.2@60.104,26.758 62.23,24.632 v2(62.23,18.161) ; LS3.2@73.27,26.758 75.184,24.844 v2(75.184,18.17) ; LS2.2@86.435,26.758 88.265,24.928 v2(88.265,18.17) ; U12.10@93.246,34.213 v2(98.883,34.213) ; LS1.2@99.601,26.758 101.219,25.14 v2(101.219,18.17) ; P13.2@114.681,7.366 v3(114.681,18.161) 114.681,19.391 C37.1@116.967,21.677
  Bottom Layer w0.508: v2(33.401,30.353) v2(33.401,34.163)
  Bottom Layer w1.016: v2(62.23,18.161) 69.427,18.161 69.436,18.17 v2(75.184,18.17) v2(88.265,18.17) v2(101.219,18.17) 114.672,18.17 v3(114.681,18.161) ; v2(98.883,34.213) 98.883,27.476 LS1.2@99.601,26.758 ; P13.2@114.78,7.62 P13.2@114.828,7.668 ; C37.1@116.967,21.677 120.523,21.677 ; B2.2@118.618,30.988 118.745,30.988 120.269,29.464 120.269,21.931 120.523,21.677 ; U14.1@135.936,12.681 133.585,12.681 132.715,11.811 125.984,11.811 125.984,21.463 125.77,21.677 ; U15.1@135.936,27.413 133.839,27.413 132.842,26.416 126.111,26.416 125.77,26.075 125.77,21.677 ; 120.523,21.677 125.77,21.677
A1: J1.1 RT1.2 | length 4
  Bottom Layer w1.27: RT1.2@38.928,84.214 38.928,87.117 J1.1@39.695,87.884
A2: J7.1 RT3.2 | length 3.4
  Bottom Layer w1.016: J7.1@55.824,87.884 55.824,84.511 RT3.2@55.867,84.468
AI1: PAI1.2 PAIJ1.2 R12.1 | length 7.8
  Bottom Layer w0.508: PAI1.2@102.009,87.884 102.009,85.316 R12.1@102.87,84.455 105.283,82.042 PAIJ1.2@105.283,81.407
AI2: PAI4.2 PAIJ4.2 R21.1 | length 7.8
  Bottom Layer w0.508: PAI4.2@95.024,87.884 95.024,85.291 R21.1@95.86,84.455 98.298,82.017 PAIJ4.2@98.298,81.407
AI3: PAI2.2 PAIJ2.2 R13.1 | length 7.8
  Bottom Layer w0.508: PAI2.2@88.039,87.884 88.039,84.681 PAIJ2.2@91.313,81.407
AI4: PAI5.2 PAIJ5.2 R22.1 | length 7.8
  Bottom Layer w0.508: PAI5.2@81.054,87.884 81.054,84.681 PAIJ5.2@84.328,81.407
AI5: PAI3.2 PAIJ3.2 R14.1 | length 7.8
  Bottom Layer w0.508: PAI3.2@74.069,87.884 74.069,84.681 PAIJ3.2@77.343,81.407
AI6: PAI6.2 PAIJ6.2 R23.1 | length 7.8
  Bottom Layer w0.508: PAI6.2@67.084,87.884 67.084,84.681 PAIJ6.2@70.358,81.407
AIN1: C10.1 D2.1 R31.2 U23.24 | length 65.7
  Top Layer w0.254: U23.24@58.889,53.447 58.889,55.587 63.5,60.198 66.421,60.198 69.977,63.754 100.755,63.754 103.041,66.04 106.299,66.04 107.315,67.056 107.315,69.78
  Top Layer w0.508: D2.1@104.963,69.78 107.315,69.78 C10.1@109.467,69.78 ; C10.1@109.474,69.786 R31.2@109.474,72.898
AIN2: C16.1 D2.2 R38.2 U23.25 | length 62.1
  Top Layer w0.254: 58.381,54.991 58.381,55.797 58.389,55.805 ; U23.25@58.389,53.447 58.389,55.805 ; 101.473,69.786 101.473,65.659 100.076,64.262 69.469,64.262 66.04,60.833 63.417,60.833 58.389,55.805
  Top Layer w0.508: R38.2@98.552,72.898 C16.1@98.552,69.786 101.473,69.786 D2.2@103.056,69.786
AIN3: C11.1 D3.1 R32.2 U23.26 | length 52.9
  Top Layer w0.254: U23.26@56.789,51.847 56.789,55.011 63.246,61.468 65.957,61.468 69.259,64.77 89.281,64.77 91.186,66.675 91.186,69.786
  Top Layer w0.508: D3.1@88.841,69.786 91.186,69.786 C11.1@93.091,69.786 R32.2@93.091,72.898
AIN4: C17.1 D3.2 R39.2 U23.29 | length 53.3
  Top Layer w0.254: 54.035,50.994 54.682,50.347 U23.29@56.789,50.347 ; 54.682,50.355 54.038,50.998 54.038,52.979 63.036,61.976 65.746,61.976 69.048,65.278 83.693,65.278 85.217,66.802 85.217,69.786
  Top Layer w0.508: R39.2@82.55,72.898 C17.1@82.55,69.786 85.217,69.786 D3.2@86.927,69.786
AIN5: C7.1 D1.1 R30.2 U23.30 | length 43.3
  Top Layer w0.254: U23.30@56.789,49.847 54.166,49.847 53.34,50.673 53.34,52.999 62.825,62.484 65.536,62.484 68.838,65.786 73.533,65.786 74.422,66.675 74.422,69.78
  Top Layer w0.508: D1.1@72.197,69.78 74.422,69.78 76.32,69.78 C7.1@76.327,69.786 76.327,72.771 R30.2@76.2,72.898
AIN6: C15.1 D1.2 R33.2 U23.31 | length 39.5
  Top Layer w0.254: U23.31@56.789,49.347 53.65,49.347 52.832,50.165 52.832,53.209 62.615,62.992 65.325,62.992 68.58,66.247 68.58,69.786
  Top Layer w0.508: R33.2@65.913,72.898 65.913,69.913 C15.1@66.04,69.786 68.58,69.786 70.29,69.786 D1.2@70.297,69.78
AINP1: C1.1 R12.2 R15.1 U2.3 | length 22.7
  Top Layer w0.508: v1(104.521,75.184) U2.3@106.286,75.184
  Bottom Layer w0.508: v1(104.521,75.184) 106.934,77.597 106.934,82.423 R12.2@104.902,84.455 104.902,85.217 103.759,86.36 103.759,90.525 R15.1@104.419,91.185 C1.1@106.743,91.185
AINP2: C4.1 R21.2 R24.1 U2.5 | length 21.8
  Top Layer w0.508: U2.5@101.486,76.454 101.613,76.327 v1(103.251,76.327)
  Bottom Layer w0.508: C4.1@99.427,91.185 R24.1@97.104,91.185 96.774,90.855 96.774,86.36 97.892,85.242 R21.2@97.892,84.455 97.892,84.226 100.711,81.407 100.711,78.867 v1(103.251,76.327)
AINP3: C2.1 R13.2 R16.1 U3.3 | length 23
  Top Layer w0.508: v1(88.392,75.184) U3.3@90.157,75.184
  Bottom Layer w0.508: v1(88.392,75.184) 92.571,79.363 92.571,81.928 90.881,83.618 R13.2@90.881,84.455 90.881,85.649 89.789,86.741 R16.1@89.789,91.185 C2.1@92.112,91.185
AINP4: C5.1 R22.2 R25.1 U3.5 | length 21
  Top Layer w0.508: U3.5@85.357,76.454 v1@86.995,76.454
  Bottom Layer w0.508: C5.1@84.989,91.376 84.797,91.185 R25.1@82.474,91.185 82.562,91.097 82.562,86.856 83.871,85.547 R22.2@83.871,84.455 83.871,84.277 87.122,81.026 v1(87.122,76.327)
AINP5: C3.1 R14.2 R17.1 U5.3 | length 26.9
  Top Layer w0.508: v1(71.501,75.311) 73.393,75.311 U5.3@73.52,75.184
  Bottom Layer w0.508: v1(71.501,75.311) 73.533,77.343 76.581,77.343 79.121,79.883 79.121,82.194 R14.2@76.86,84.455 76.86,85.192 75.577,86.475 75.577,90.767 R17.1@75.158,91.185 C3.1@77.482,91.185
AINP6: C6.1 R23.2 R26.1 U5.5 | length 23.6
  Top Layer w0.508: v1(66.548,76.581) 66.675,76.454 U5.5@68.72,76.454
  Bottom Layer w0.508: v1(66.548,76.581) 68.58,76.581 71.628,79.629 71.628,82.677 R23.2@69.85,84.455 69.85,85.471 68.961,86.36 68.961,91.185 ; R26.1@67.843,91.185 68.961,91.185 ; C6.1@70.167,91.185 68.961,91.185
AIO1: P1.3 R59.2 | length 47.7
  Top Layer w0.254: P1.3@136.906,79.677 136.954,79.629 136.954,79.327 138.684,77.597 146.3,77.597 149.098,74.799 149.098,71.037 148.082,70.021 148.082,44.577 146.939,43.434 R59.2@145.844,43.434
AIO2: P2.3 R73.2 | length 45.7
  Top Layer w0.254: P2.3@129.794,79.677 129.794,78.359 131.064,77.089 146.09,77.089 148.59,74.589 148.59,71.247 147.574,70.231 147.574,52.832 146.939,52.197 R73.2@145.971,52.197
AIO3: P3.3 R58.2 | length 42.5
  Top Layer w0.254: P3.3@122.301,79.677 122.301,79.502 123.349,78.454 124.428,78.454 126.3,76.581 145.879,76.581 148.082,74.378 148.082,71.545 147.066,70.529 147.066,61.849 146.558,61.341 R58.2@145.844,61.341
AIO4: P4.3 R72.2 | length 39.5
  Top Layer w0.254: P4.3@114.935,79.677 116.761,77.851 124.312,77.851 126.09,76.073 145.669,76.073 147.574,74.168 147.574,71.755 147.066,71.247 R72.2@145.59,71.247
AO1: D9.2 P1.2 P1.4 P5.1 | length 14.2
  Bottom Layer w0.762: P1.2@134.366,82.169 137.287,82.169 137.287,84.328 136.624,84.991 P5.1@136.624,87.932 136.87,87.932 D9.2@140.426,91.488
AO2: D10.2 P2.2 P2.4 P6.1 | length 12.8
  Bottom Layer w0.762: P2.2@127.254,82.169 P2.4@129.794,82.169 ; P2.4@129.597,82.239 P6.1@129.597,87.932 132.044,90.379 D10.2@132.044,91.488
AO3: D11.2 P3.2 P3.4 P7.1 | length 11.6
  Bottom Layer w0.762: P3.2@119.761,82.217 P3.4@122.301,82.217 ; P3.4@122.569,82.852 P7.1@122.569,87.932 123.535,88.898 D11.2@123.535,91.488
AO4: D12.2 P4.2 P4.4 P8.1 | length 12.3
  Bottom Layer w0.762: P4.2@112.395,82.217 P4.4@114.935,82.217 114.935,87.325 P8.1@115.542,87.932 115.026,88.448 D12.2@115.026,91.488